# Altium PCB PCB.PcbDoc
Units mm, origin at the board's own origin, x right, y up, seen from the top; angles counter-clockwise.
Board outline 95.16 x 66.21 mm, 2 copper layers (Top Layer, Bottom Layer); 30 components, 22 nets, 105 pads, 0 vias.
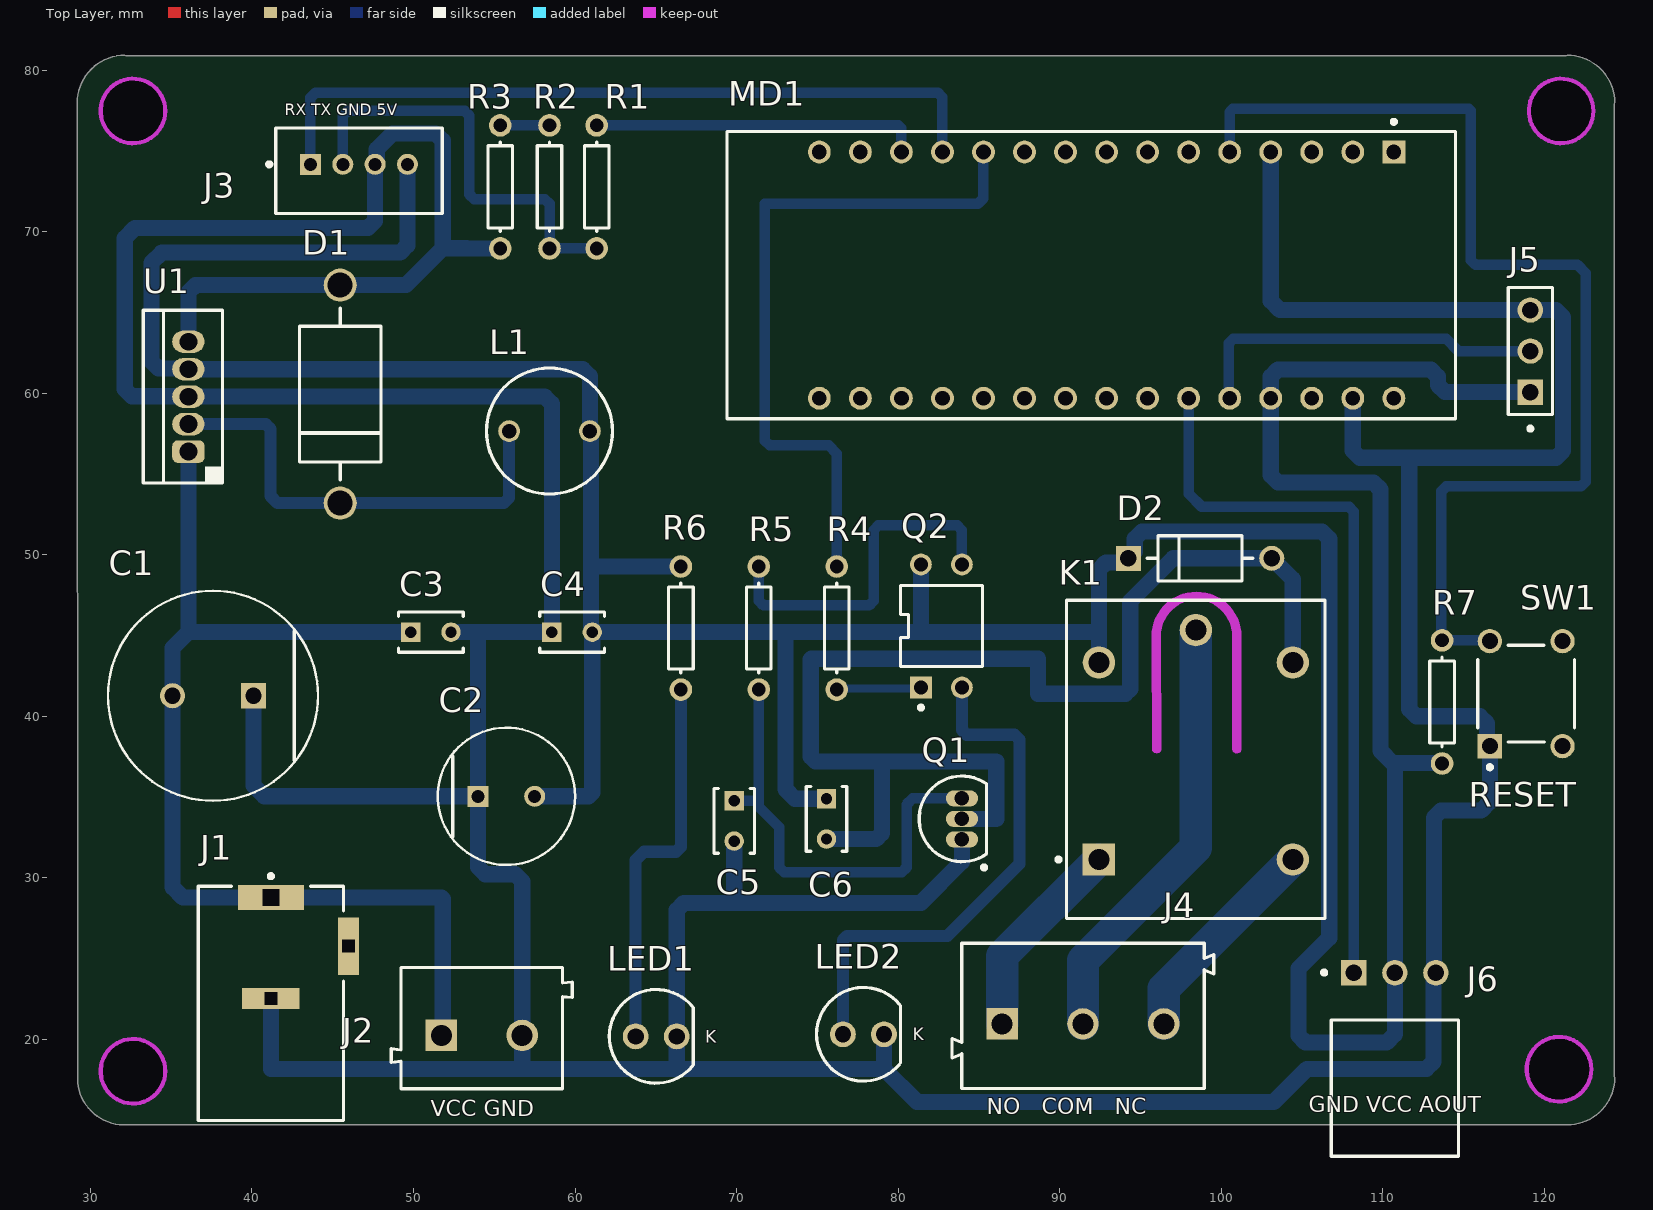
[diagram p0: Top Layer view]
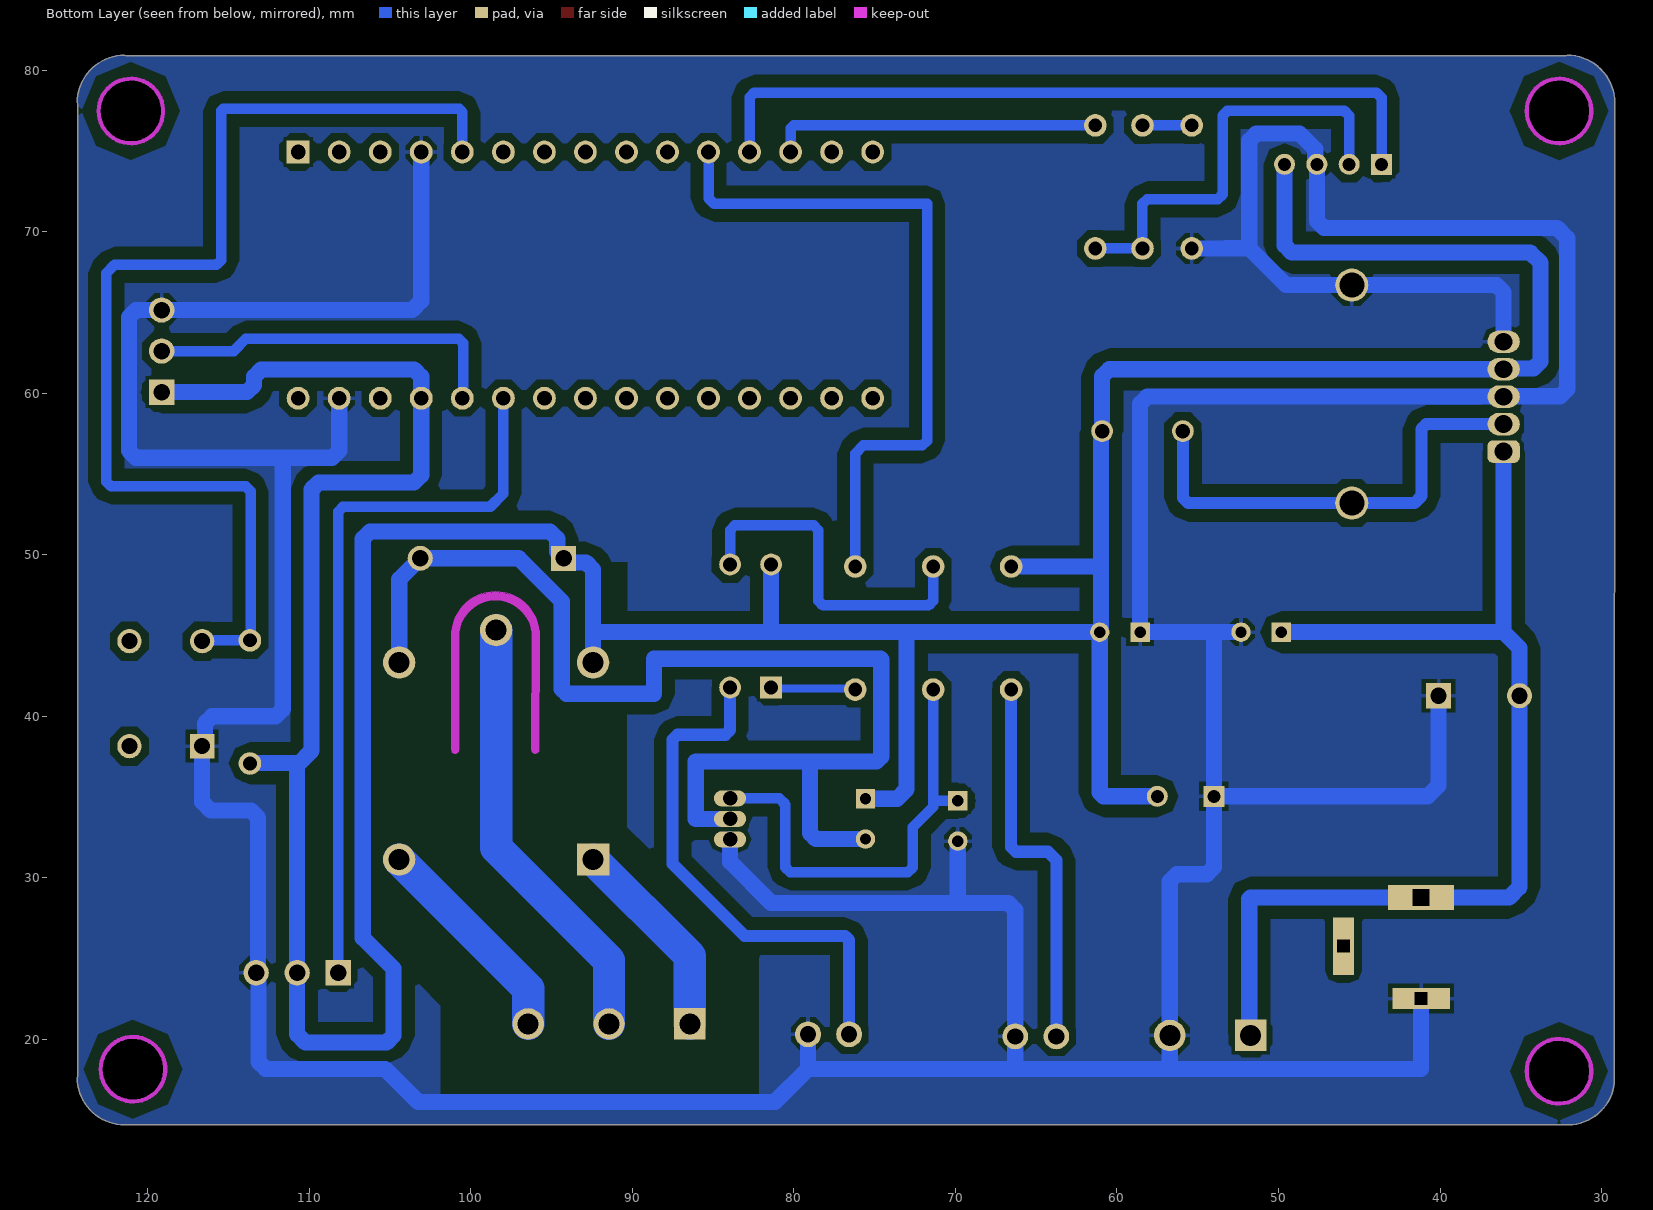
[diagram p1: Bottom Layer view, seen from below]
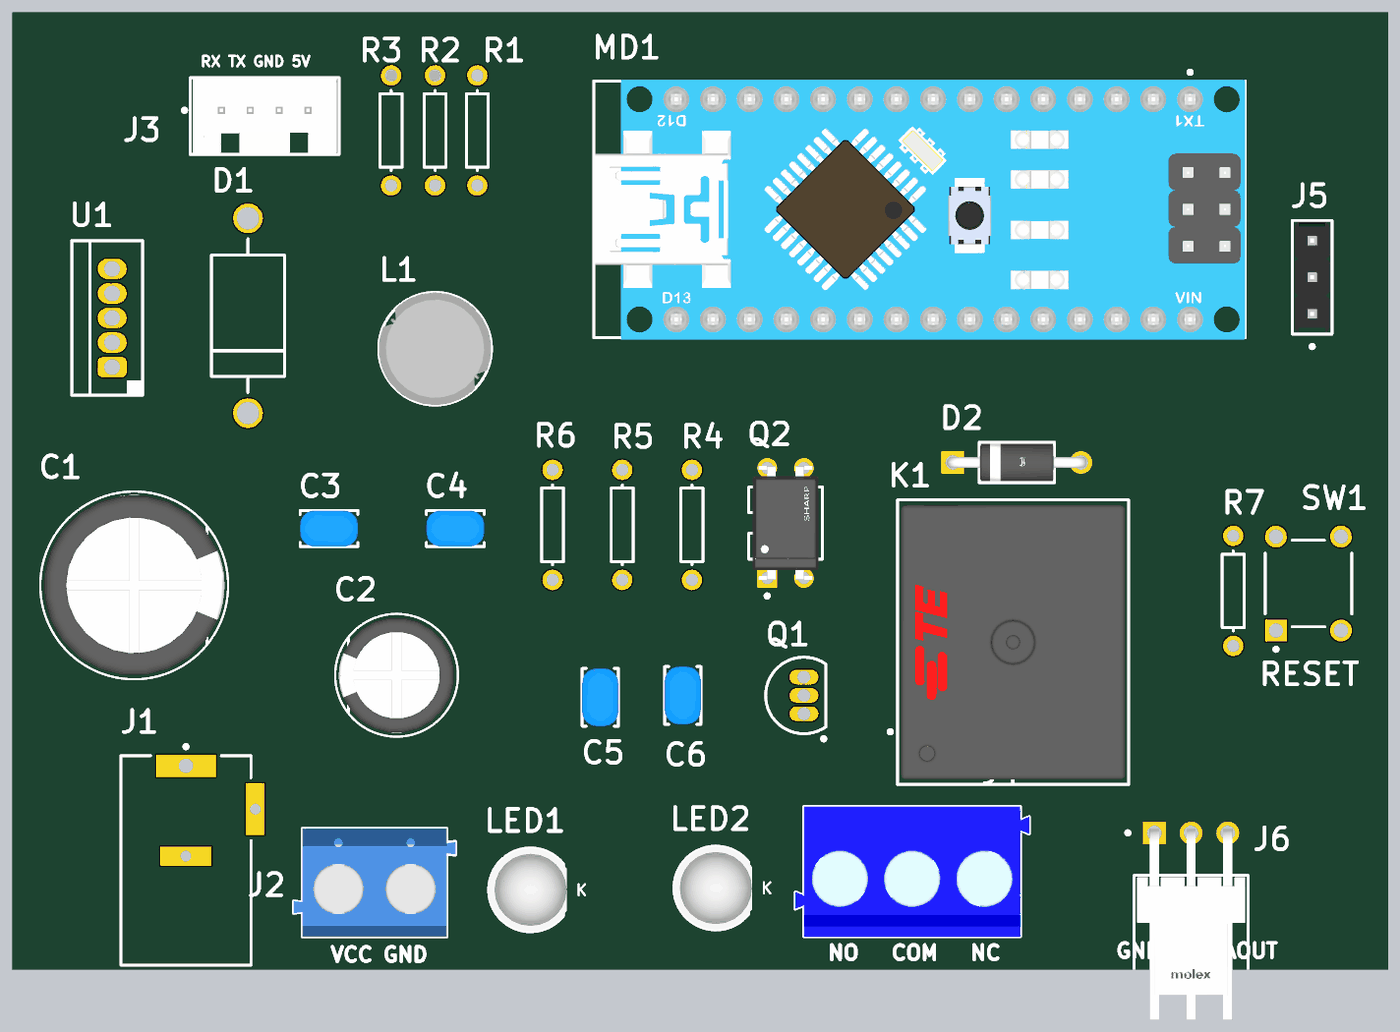
[diagram p2: 3D render of the assembled board from above, using the file's embedded part models]

## Layer stack, top to bottom
Top Solder: solder mask 0.0102, Solder Resist, Dk 3.5
Top Layer: signal copper 0.0356
Dielectric 1: dielectric 0.32, FR-4, Dk 4.8
Bottom Layer: signal copper 0.0356
Bottom Solder: solder mask 0.0102, Solder Resist, Dk 3.5

## Board outline
29.208,17.335 ccw(c32.131,17.653) 31.81,14.73 31.877,14.711 121.346,14.731 121.412,14.713 ccw(c121.412,17.653) 124.352,17.653 124.333,17.72 124.333,77.911 124.352,77.978 ccw(c121.412,77.978) 121.412,80.918 121.345,80.899 32.198,80.899 32.131,80.918 ccw(c32.131,77.978) 29.191,77.98 29.191,77.978
cut-out: 95.757,37.971 95.715,44.956 95.715,44.958 cw(c98.465,44.958) 101.215,44.958 101.215,37.973 cw(c100.965,37.973) 100.715,37.973 100.715,44.958 ccw(c98.465,44.958) 96.215,44.959 96.258,37.974 96.258,37.973 cw(c96.007,37.973)
cut-out: 118.904,18.161 ccw(c120.904,18.161) 120.904,16.161 ccw(c120.904,18.161) 122.904,18.161 ccw(c120.904,18.161) 120.904,20.161 ccw(c120.904,18.161)
cut-out: 119.031,77.47 ccw(c121.031,77.47) 121.031,75.47 ccw(c121.031,77.47) 123.031,77.47 ccw(c121.031,77.47) 121.031,79.47 ccw(c121.031,77.47)
cut-out: 32.639,75.47 cw(c32.639,77.47) 30.639,77.47 cw(c32.639,77.47) 32.639,79.47 cw(c32.639,77.47) 34.639,77.47 cw(c32.639,77.47)
cut-out: 30.639,18.034 ccw(c32.639,18.034) 32.639,16.034 ccw(c32.639,18.034) 34.639,18.034 ccw(c32.639,18.034) 32.639,20.034 ccw(c32.639,18.034)

## Design rules (kind name [scope] priority, off if disabled: settings)
Clearance [All] p1: gap=0.2 ignorepadtopadclearanceinfootprint=FALSE except(0.7: Arc-Fill Arc-Poly Arc-Region Track-Fill Track-Poly Track-Region SMDPad-Fill SMDPad-Poly SMDPad-Region Via-Fill Via-Poly Via-Region Fill-Hole Poly-Hole Region-Hole)
ComponentClearance [All] p1: gap=0.254 collisioncheckmode=3 verticalgap=0.254 showdistances=FALSE donotcheckwithout3dbody=TRUE
DiffPairsRouting [All] p1: maxlimit=1 minlimit=0.5 mostfreqgap=0.5 toplayer_minwidth=1 toplayer_maxwidth=2 toplayer_prefwidth=1 bottomlayer_minwidth=1 bottomlayer_maxwidth=2 bottomlayer_prefwidth=1 maxuncoupledlength=12.7
PolygonConnect [All] p1: connectstyle=Relief reliefconductorwidth=0.254 reliefentries=4 polygonreliefangle="90 Angle" airgapwidth=0.254
RoutingCorners [All] p1: cornerstyle=45-Degree minsetback=0.5 maxsetback=1
RoutingLayers [All] p1: top layer_v5=FALSE bottom layer_v5=TRUE
RoutingVias [All] p1: holewidth=0.711 width=1.27 viastyle="Through Hole" minholewidth=0.711 minwidth=1.27 maxholewidth=0.711 maxwidth=1.27
SolderMaskExpansion [All] p1: expansion=0.102 istentingtop=FALSE
Width other [All] p1: maxlimit=2 minlimit=0.254 preferedwidth=1 toplayer_maxwidth=0.254 toplayer_prefwidth=0.254 minimp=50.000000 maximp=50.000000 favimp=50.000000
Width gnd [InNet('GND')] p2: maxlimit=1 minlimit=1 preferedwidth=1 minimp=50.000000 maximp=50.000000 favimp=50.000000
Width 5 [InNet('+5')] p3: maxlimit=1 minlimit=1 preferedwidth=1 minimp=50.000000 maximp=50.000000 favimp=50.000000
Width 12 [InNet('+12')] p4: maxlimit=1 minlimit=1 preferedwidth=1 minimp=50.000000 maximp=50.000000 favimp=50.000000
26 further rules are at their usual default settings.

## Classes and differential pairs
component class FarmControl: C1 C2 C3 C4 C5 C6 D1 D2 J3 J4 J5 J6 K1 L1 LED1 LED2 MD1 Q1 Q2 R1 R2 R3 R4 R5 R6 R7 SW1 U1

## Components (designator, comment, footprint, x,y, rotation, side; value= is the part's Value field where it differs from the comment)
C1 "680uF" FP-RAD-TH-D_12_5_0_5-L_30-MFG 37.592,41.275 r180 top
C2 "220uF" FP-RAD-TH-D_8_0_5-L_11_5-MFG 55.753,35.052 r0 top
C3 "104" FP-RCE1A2-MFG 51.074,45.212 r0 top
C4 "104" FP-RCE1A2-MFG 59.817,45.212 r0 top
C5 "104" FP-RCE1A2-MFG 69.85,33.528 r270 top
C6 "104" FP-RCE1A2-MFG 75.565,33.655 r270 top
D1 "1N5822" ONSC-AXIAL_LEAD-2-267-05_V 45.466,59.944 r90 top
D2 "1N4007" FP-1N4007-MFG 98.684,49.784 r0 top value=15pF
J1 "POWER" SWITCH-RAPC712X-3_V 41.174,25.656 r0 top
J2 "Power" 691102710002 54.229,20.701 r0 top
J3 "ESP" FP-110990030-MFG 46.625,73.768 r0 top
J4 "relay" 691101710003 91.44,21.463 r0 top
J5 "DHT11" FP-22-28-4030-MFG 119.126,62.611 r90 top
J6 "22-05-3031" FP-22-05-3031-MFG 110.744,16.99 r0 top
K1 "Relay" FP-1-1721150-0-MFG 98.425,37.338 r90 top
L1 "33uH" WE-TI-L 58.42,57.658 r0 top
LED1 "5V_PW" "Type 5mm" 65.024,20.193 r0 top
LED2 "RL ON" "Type 5mm" 77.851,20.32 r0 top
MD1 "Arduino Nano" FP-A000005-MFG 91.948,67.31 r270 top
Q1 "C1815" TO-226-AA 83.947,33.655 r0 top
Q2 "PC817X1J000F" FP-PC817X1J000F-MFG 82.677,45.593 r90 top
R1 "Res1" AXIAL-0.3 61.341,72.771 r90 top value=1K
R2 "Res1" AXIAL-0.3 58.42,72.771 r270 top value=1K
R3 "Res1" AXIAL-0.3 55.372,72.771 r90 top value=1K
R4 "Res1" AXIAL-0.3 76.2,45.466 r90 top value=1K
R5 "Res1" AXIAL-0.3 71.374,45.466 r270 top value=1K
R6 "Res1" AXIAL-0.3 66.548,45.466 r90 top value=1K
R7 "" AXIAL-0.3 113.665,40.894 r90 top value=10K
SW1 "RESET" TECO-1825910-6_V 118.872,41.402 r90 top
U1 "LM2576HVT-5.0/NOPB" KC0005A 36.068,59.788 r180 top

## Footprints (in the part's own frame and the unit in brackets; to place one, negate y for a bottom-side part, rotate by r counter-clockwise, add the part's x,y. Pads: shape width x height; smd on the part's side, far side on the other; paste and mask are expansions set on the pad)
691101710003 [mm] "5,00mm - modular - blue - Horizontal entry with pressure clamp - 12,6mm height - 03p"
  rect 1.95x1.95 hole 1.3: 1(-5,-0.5)
  round 1.95 hole 1.3: 2(0,-0.5) 3(5,-0.5)
  silkscreen extent -8.1,-4.5 8.1,4.5, body extent -8.1,-4.5 8.1,4.5, height 12.65
691102710002 [mm] "5,00mm - modular - blue - Horizontal entry with pressure clamp - 9,9 mm height - 02p"
  rect 1.95x1.95 hole 1.3: 1(-2.5,-0.45)
  round 1.95 hole 1.3: 2(2.5,-0.45)
  silkscreen extent -5.6,-3.75 5.6,3.75, body extent -5.6,-3.75 5.6,3.75, height 9.96
AXIAL-0.3 [mm] "Axial Device, Thru-Hole; 2 Leads; 0.3 in Pin Spacing"
  round 1.4 hole 0.85: 1(-3.81,0) 2(3.81,0)
  silkscreen extent -2.77,-0.76 2.77,0.76
FP-1-1721150-0-MFG [mm]
  rect 2x2 hole 1.3 paste-1000 mask+0: 1(-6.2,6)
  round 2 hole 1.3 paste-1000 mask+0: 2(6,6) 3(8,0) 4(-6.2,-6) 5(6,-6)
  silkscreen extent -9.85,-8 9.85,8.62, body extent -9.95,-8.1 9.95,8.1, height 0.25
FP-1N4007-MFG [mm]
  rect 1.55x1.55 hole 1 paste-1000 mask+0: 1(-4.44,0)
  round 1.55 hole 1 paste-1000 mask+0: 2(4.44,0)
  silkscreen extent -3.27,-1.4 3.27,1.4, body extent -5.32,-1.5 5.32,1.5, height 0.25
FP-22-05-3031-MFG [mm]
  rect 1.57x1.57 hole 1.02 paste-1000 mask+0: 1(-2.54,7.14)
  round 1.57 hole 1.02 paste-1000 mask+0: 2(0,7.14) 3(2.54,7.14)
  silkscreen extent -4.5,-4.22 3.94,7.27, body extent -4.04,-6.02 4.04,8.03, height 0.25
FP-22-28-4030-MFG [mm]
  rect 1.57x1.57 hole 1.02 paste-1000 mask+0: 1(-2.54,0)
  round 1.57 hole 1.02 paste-1000 mask+0: 2(0,0) 3(2.54,0)
  silkscreen extent -4.92,-1.37 3.94,1.37, body extent -4.04,-1.47 4.04,1.47, height 0.25
FP-110990030-MFG [mm]
  rect 1.3x1.3 hole 0.8 paste-1000 mask+0: 1(-3,0.4)
  round 1.3 hole 0.8 paste-1000 mask+0: 2(-1,0.4) 3(1,0.4) 4(3,0.4)
  silkscreen extent -5.67,-2.65 5.15,2.65, body extent -5.25,-2.75 5.25,2.75, height 0.25
FP-A000005-MFG [mil]
  rect 55.67x55.67 hole 35.98 paste-39370.1 mask+0: 1(-300,737.5)
  round 55.67 hole 35.98 paste-39370.1 mask+0: 2(-300,637.5) 3(-300,537.5) 4(-300,437.5) 5(-300,337.5) 6(-300,237.5) 7(-300,137.5) 8(-300,37.5) 9(-300,-62.5) 10(-300,-162.5) 11(-300,-262.5) 12(-300,-362.5) 13(-300,-462.5) 14(-300,-562.5) 15(-300,-662.5) 16(300,-662.5) 17(300,-562.5) 18(300,-462.5) 19(300,-362.5) 20(300,-262.5) 21(300,-162.5) 22(300,-62.5) 23(300,37.5) 24(300,137.5) 25(300,237.5) 26(300,337.5) 27(300,437.5) 28(300,537.5) 29(300,637.5) 30(300,737.5)
  silkscreen extent -379,-888 350,888, body extent -354,-891 354,891, height 10
FP-PC817X1J000F-MFG [mm]
  rect 1.35x1.35 hole 0.85 paste-1000 mask+0: 1(-3.81,1.27)
  round 1.35 hole 0.85 paste-1000 mask+0: 2(-3.81,-1.27) 3(3.81,-1.27) 4(3.81,1.27)
  silkscreen extent -5.17,-2.54 2.5,2.54, body extent -4.58,-2.64 4.58,2.64, height 0.25
FP-RAD-TH-D_8_0_5-L_11_5-MFG [mm]
  rect 1.3x1.3 hole 0.8 paste-1000 mask+0: 1(-1.75,0)
  round 1.3 hole 0.8 paste-1000 mask+0: 2(1.75,0)
  silkscreen extent -4.25,-4.25 4.25,4.25, body extent -4.35,-4.35 4.35,4.35, height 0.25
FP-RAD-TH-D_12_5_0_5-L_30-MFG [mm]
  rect 1.55x1.55 hole 1 paste-1000 mask+0: 1(-2.5,0)
  round 1.55 hole 1 paste-1000 mask+0: 2(2.5,0)
  silkscreen extent -6.5,-6.5 6.5,6.5, body extent -6.6,-6.6 6.6,6.6, height 0.25
FP-RCE1A2-MFG [mm]
  rect 1.2x1.2 hole 0.7 paste-1000 mask+0: 1(-1.25,0)
  round 1.2 hole 0.7 paste-1000 mask+0: 2(1.25,0)
  silkscreen extent -2,-1.25 2,1.25, body extent -2.1,-1.35 2.1,1.35, height 0.25
KC0005A [mm] "FM, 5-Leads, Body 10.16x8.46mm, Pitch 1.7mm"
  rrect50% 2x1.4 hole 1.1: 1(0,3.4)
  oval 2x1.4 hole 1.1: 2(0,1.7) 3(0,0) 4(0,-1.7) 5(0,-3.4)
  silkscreen extent -2.13,-5.36 2.8,5.34, body extent -2.08,-5.35 2.77,5.35, height 16.51
ONSC-AXIAL_LEAD-2-267-05_V [mm] "AXIAL, 2-Leads, Diameter 5.05mm"
  round 2.05 hole 1.55: 1(-6.745,0) 2(6.745,0)
  silkscreen extent -5.32,-2.53 5.32,2.53
SWITCH-RAPC712X-3_V [mm] "CONN, 3-Leads, Body 14.5x9mm"
  rect 4.1x1.55 hole 1.01 square: 1(0,3.125)
  rect 3.55x1.3 hole 0.76 square: 2(0,-3.125)
  rect 1.3x3.55 hole 0.76 square: 3(4.8,0.125)
  silkscreen extent -4.5,-10.67 4.5,4.57, body extent -4.5,-10.68 4.5,3.83, height 11
TECO-1825910-6_V [mm] "Switch, 4-Leads, Body 5.99x5.99mm"
  rect 1.5x1.5 hole 0.99: 1(-3.25,2.25)
  round 1.5 hole 0.99: 2(3.25,2.25) 3(-3.25,-2.25) 4(3.25,-2.25)
  silkscreen extent -4.67,-2.99 2.99,3, body extent -3,-2.99 2.99,3, height 5
TO-226-AA [mm] "TO, Flat Index; 3 In-Line, Axial Leads; Body Dia. 4.8mm; Leads 0.55 x 0.51 mm (max)"
  oval 2x1 hole 0.9: 1(0,-1.27) 2(0,0) 3(0,1.27)
  silkscreen extent -2.65,-3.13 1.52,2.65, body extent -2.65,-2.66 1.52,2.66, height 5.33
"Type 5mm" [mm] "THT, LED-5mm, 2pin- Body 5.8mm"
  round 1.6 hole 1: 1(1.27,0) 2(-1.27,0)
  silkscreen extent -2.9,-2.9 2.29,2.9, body extent -2.9,-2.9 2.5,2.9, height 11.7
WE-TI-L [mm] "THT Inductor, 2-Leads, Body 8,0  mm"
  round 1.35 hole 0.9: 1(-2.5,0) 2(2.5,0)
  silkscreen extent -3.9,-3.9 3.9,3.9, body extent -3.9,-3.9 3.89,3.9, height 9.5

## Part data
C1: library part CMP-05427-002075-1, "Aluminum Electrolytic Capacitors (Radial Lead Type) AEC-Q200 Qualified 680uF ±20% 50V", Case/Package=Radial, ESR (Equivalent Series Resistance)=40mR, Leakage Current=3uA, Max Operating Temperature=105°C, Min Operating Temperature=-55°C, Package Quantity=100, Ratings=AEC-Q200, Ripple Current=2.215A, Tolerance=20%, Voltage=50V, Capacitance=680uF, Construction=RADIAL, Diameter=12.5mm, Height=30mm, Height - Seated (Max)=1.181inch, Impedance=40mR, Lead Diameter=0.8mm, Lead Free="Lead Free", Lead Pitch=5mm, Length=30mm, Life (Hours)=5000Hour, Material=Aluminium, Mount="Through Hole", Number of Pins=2, Packaging=Bulk, Radiation Hardening=No, REACH SVHC="No SVHC", Ripple Current (AC)=2.215A, RoHS Compliant=Yes, Series=FC, Termination=Radial, Voltage Rating=50V, Voltage Rating (DC)=50V, Width=12.5mm
C2: library part CMP-05427-000847-1, "Aluminum Electrolytic Capacitors (Radial Lead Type) 220uF ±20% 25V", Case/Package=Radial, Max Operating Temperature=105°C, Min Operating Temperature=-40°C, Ripple Current=950mA, Tolerance=20%, Voltage=25V, Capacitance=220uF, Construction=RADIAL, Contact Plating=Tin, Diameter=8mm, Height=11.5mm, Impedance=56mR, Lead Diameter=0.6mm, Lead Pitch=3.5mm, Life (Hours)=6000Hour, Mount="Through Hole", REACH SVHC=Yes, Ripple Current (AC)=950mA, RoHS Compliant=Yes, Series="FR Radial", Termination=Radial, Voltage Rating=25V, Voltage Rating (DC)=25V
C3 C4 C5 C6: library part CMP-06035-052488-1, "Cap Ceramic 100nF 100V X7R ±10% Radial 2.5mm +125°C Automotive Ammo Pack", Capacitance=100nF, Case/Package=Radial, Dielectric=X7R, Max Operating Temperature=125°C, Min Operating Temperature=-55°C, Package Quantity=2000, Ratings=AEC-Q200, Resistor Type=Ceramic, Tolerance=10%, Voltage Rating=100V, Height=3.5mm, Height - Seated (Max)=0.138inch, Lead Diameter=0.5mm, Lead Free="Lead Free", Lead Pitch=0.098inch, Lead/Base Style=Straight, Length=0.157inch, Mount="Through Hole", Packaging="Tape and Reel", Termination=Radial, Voltage Rating (DC)=100V, Width=0.098inch
D1: library part CMP-1055-00007-1, "Rectifier, 2-Pin Axial_Lead, Bulk Bag", Manufacturer="On Semiconductor", ComponentLink1Description="Manufacturer URL", ComponentLink1URL=http://www.onsemi.com/, ComponentLink2Description=Datasheet, ComponentLink2URL=http://www.onsemi.cn/pub_link/Collateral/1N5820-D.PDF, ComponentLink3Description="Package Specification", ComponentLink3URL=http://www.onsemi.com/pub_link/Collateral/267-05.PDF, Configuration=Single, DatasheetVersion="Rev. 10", IFSM Max (A)=80, Mounting Technology="Through Hole", Note1=0, PackageDescription="2-Pin, Axial Lead, Diameter 5.05 mm", PackageReference=AXIAL_LEAD-2-267-05, PackageVersion="Rev. G, 06/2000", Packing="Bulk Bag", PartNumber=1N5822, RoHS=FALSE
D2: library part CMP-123542-000001-1, "Rectifier diode 1000 V 1 A DO-41, ,", Capacitance=15pF, Forward Current=1A, Manufacturer=Diotec, Max Junction Temp=+175°C, Max Repetitive Reverse Voltage=1000V, Max Surge Forward Current=27A, Peak Reverse Current=5uA, Temperature="-50°C to +175°C", Temperature Range Low=-50°C, Automotive=No, Category=Diode, ComponentLink2Description=Datasheet, ComponentLink2URL=https://datasheet.octopart.com/1N4007-Diotec-datasheet-62346875.pdf, Device Class L1="Discrete Semiconductors", Device Class L2=Diodes, Device Class L3="Rectifier Diodes", Height=2.8mm, Ipc Land Pattern Name=DIOAD888W100L520D280, Lead Free=Yes, Manufacturer Part Number=1N4007, Octopart=https://octopart.com/1n4007-diotec-4040411, Package=1N4007, Reverse Voltage=1000V, RoHS=TRUE, Temperature Range High=+175°C
J1: library part CMP-2000-05383-1, "Conn Powerjack Mini R/A PCMT, 5 A, 3-Pin THD, RoHS", Color=Black, Current Rating=5A, Manufacturer=Switchcraft, Standard Package=2,500, Catalog Drawings="RAPC7(1,2)2XSide /  / RAPC7(1,2)2XTop", Category=Connectors,Interconnects, Connector Type=Jack, Contact Material=Brass, Contact Material - Plating=Nickel, Datasheet URL=https://datasheet.ciiva.com/391/rapc712x-cd-391666.pdf, Datasheet Version="Rev. A, 08/2005", Dynamic Catalog=SwitchcraftInc, Family=Barrel-PowerConnectors, Gender=Male, Housing Color=Black, Housing Material=Thermoplastic, Internal Switch(s)=SingleSwitch,NormallyClosed, Manufacturer URL=http://www.switchcraft.com/, Mating Products="SC1539-ND / -CONNPLUGMINIPWR2CONDBLK/RED / SC1051-ND / -CONNPLUGMINIPOWER2CONDBLACK", Mounting Type=ThroughHole,RightAngle, Number of Positions/Contacts=2Conductors,2Contacts, Other Names="Q2387461 / Q2526383 / RAPC712X-ND / SC237", Plug/Mating Plug Diameter=2.5mmID,5.5mmOD, RoHS Information=SwitchcraftRoHSInfo, Shielding=Unshielded, Termination=SolderEyelet(s)
J2: library part CMP-1502-03258-1, "Series 102 - 5.00 mm Horizontal Entry Modular with Pressure Clamp WR-TBL, 2 pin", Manufacturer="Wurth Elektronik", Operating Temperature=-40to105degC, Package Reference=691102710002, Datasheet URL=http://katalog.we-online.de/em/datasheet/6911027100xx.pdf, Manufacturer URL=http://www.we-online.de, Mounting Technology=THT, Packaging=Box, Part Number=691102710002, Pin Number=2, Pitch=5.00mm, Publisher=WurthElektronik
J3: library part CMP-139044-000001-1, "GROVE 2MM 4PIN VERT CONN 10PCS", Series=-
J4: library part CMP-1502-03257-1, "Series 101 - 5.00 mm Horizontal Entry Modular with Pressure Clamp WR-TBL, 3 pin", Manufacturer="Wurth Elektronik", Operating Temperature=-40to105degC, Package Reference=691101710003, Datasheet URL=http://katalog.we-online.de/em/datasheet/6911017100xx.pdf, Manufacturer URL=http://www.we-online.de, Mounting Technology=THT, Packaging=Box, Part Number=691101710003, Pin Number=3, Pitch=5.00mm, Publisher=WurthElektronik
J5: library part CMP-04776-000098-1, "CONN HEADER VERT 3POS 2.54MM", Current Rating=4A, Manufacturer=Molex, Manufacturer Part Number=22-28-4030, Temperature="-40°C to +80°C", Temperature Range High=+80°C, Temperature Range Low=-40°C, Voltage Rating=500V, Automotive=No, Category=Conn, ComponentLink2Description=Datasheet, ComponentLink2URL=https://www.molex.com/webdocs/datasheets/pdf/en-us/0022284030_PCB_HEADERS.pdf, Conn Gender=Male, Conn Orientation=Vertical, Contact Material=Gold,Nickel, Device Class L1=Connectors, Device Class L2="Headers and Wire Housings", Device Class L3=unset, Digikey Description="CONN HEADER VERT 3POS 2.54MM", Footprint Url=https://www.molex.com/pdm_docs/sd/022284030_sd.pdf, Height=8.88mm, Lead Free=Yes, Mouser Description="Headers & Wire Housings 3P VERT HEADER Sn", Number Of Contacts=3, Number Of Rows=1, Octopart=https://octopart.com/0022284030-molex-10476094, Package=22-28-4030, Pitch=2.54mm, RoHS=TRUE
J6: library part CMP-04776-000253-1, "CONN HEADER R/A 3POS 2.54MM", Color=White, Contact Resistance=10mR, Current Rating=4A, Flammability Rating="UL94 V-0", Insulation Resistance=50GR, Max Operating Temperature=75°C, Min Operating Temperature=0°C, Package Quantity=2000, Voltage Rating=250V, Approvals=UL, Contact Material=Brass, Contact Mating Length=0.264inch, Contact Plating=Tin, Contact Type="Male Pin", Depth=12.83mm, Fastening Type=Friction, Gender=Male, Glow Wire Compliant=Non-compliant, Halogen Free="Low Halogen", Height=6.35mm, Housing Color=White, Housing Material=Nylon, Lead Free="Lead Free", Lead Pitch=2.54mm, Length=7.62mm, Max Current Rating=4A, Mount="Through Hole", Number of Circuits=3, Number Of Contacts=3, Number of Positions=3, Number Of Rows=1, Orientation="Right Angle", Packaging=Bulk, Pitch=2.54mm, Radiation Hardening=No, RoHS Compliant=Yes, Series=7478, Termination=Solder, Voltage Rating (DC)=250V
K1: library part CMP-03395-000112-1, "RELAY GEN PURPOSE SPDT 10A 5V", Ambient Temperature Range High=+70°C, Ambient Temperature Range Low=-30°C, Coil Power=360mW, Coil Resistance=70Ω, Coil Voltage=5V, Current Rating=10A, Manufacturer=TE, Manufacturer Part Number=1-1721150-0, Automotive=No, Category=Relay, Coil Type=Non-Latching, ComponentLink2Description=Datasheet, ComponentLink2URL=https://www.te.com/usa-en/product-1-1721150-0.html?te_bu=Cor&te_type=other&te_campaign=oct_glo_cor-oct-global-oth-prtnr-fy19-oct-octo-buy-bom_sma-298_2&elqCampaignId=35216, Device Class L1=Electromechanical, Device Class L2=Relays, Device Class L3="Power Relays", Digikey Description="RELAY GEN PURPOSE SPDT 10A 5V", Height=16.3mm, Lead Free=Yes, Number Of Contacts=1, Octopart=https://octopart.com/1-1721150-0-te+connectivity-41294869, Package=1-1721150-0, RoHS=TRUE, Standoff Height=0.2mm, Switching Current=10A, Throw Configuration=SPDT
L1: library part CMP-1405-00029-1, "Radial Leaded Wire Wound Inductor WE-TI, L=330 µH", Inductance="330 ÂµH", Manufacturer="Wuerth Elektronik", PartNumber=744772331, ComponentLink1Description="Manufacturer URL", ComponentLink1URL=http://www.we-online.com, ComponentLink2Description=Datasheet, ComponentLink2URL=http://www.we-online.de/katalog/media/pdf/744772331.pdf, PackageDescription="THT Inductor, 2-Leads, Body 7.8 x 7.8 mm", PackageReference=WE-TI-L
LED1 LED2: library part CMP-1488-00009-1, "THT LED round mono-color color lens, WL-TMRW, Blue", Emitting color=Blue, Manufacturer="Wuerth Elektronik", PartNumber=151051BS04000, ComponentLink1Description="Manufacturer URL", ComponentLink1URL=http://www.we-online.com, ComponentLink2Description=Datasheet, ComponentLink2URL=http://katalog.we-online.de/pbs/datasheet/7448042001.pdfhttp://katalog.we-online.de/pbs/datasheet/7448042001.pdfhttp://katalog.we-online.de/pbs/datasheet/7448042001.pdfhttp://katalog.we-online.de/pbs/datasheet/151051BS04000.pdf, PackageReference="Type 5mm"
MD1: library part CMP-189986-000002-1, "ARDUINO NANO ATMEGA328 EVAL BRD", Operating Supply Voltage=12V, Package Quantity=50, Core Architecture=AVR, Data Bus Width=8b, Evaluation Kit=Yes, Height=0.25inch, Interface=I2C, Length=7inch, Number of Bits=8, Packaging=Bulk, REACH SVHC="No SVHC", Series="AVR® ATmega", Weight=0.358383oz, Width=5inch
Q1: library part NPN, "NPN Bipolar Transistor", Code_JEDEC=TO-226-AA, LatestRevisionDate=17-Jul-2002, LatestRevisionNote="Re-released for DXP Platform.", PackageDescription="TO, Flat Index; 3 In-Line, Axial Leads; Body Dia. 4.8mm; Leads 0.55 x 0.51 mm (max)", PackageReference=TO-226-AA, Published=8-Jun-2000, Publisher="Altium Limited"
Q2: library part CMP-65434-000003-1, "OPTOISOLATOR 5KV TRANS 4DIP", Case/Package=DIP, Collector Emitter Breakdown Voltage=80V, Collector Emitter Saturation Voltage=200mV, Current Transfer Ratio=600%, Forward Current=50mA, Forward Voltage=1.4V, Input Current=20mA, Isolation Voltage=5kV, Max Operating Temperature=100°C, Max Power Dissipation=200mW, Min Operating Temperature=-30°C, Package Quantity=2000, Reverse Breakdown Voltage=6V, Collector Emitter Voltage (VCEO)=80V, Fall Time=18000ns, Max Collector Current=50mA, Max Input Current=50mA, Mount="Through Hole", Number of Channels=1, Number of Elements=1, Number of Pins=4, Output Current per Channel=50mA, Output Voltage=80V, Packaging=Sleeve, Power Dissipation=200mW, Radiation Hardening=No, Rise Time=18000ns
R1 R2 R3 R4 R5 R6: "Resistor", LatestRevisionDate=17-Jul-2002, LatestRevisionNote="Re-released for DXP Platform.", PackageDescription="Axial Device, Thru-Hole; 2 Leads; 0.3 in Pin Spacing", PackageReference=AXIAL-0.3, Published=8-Jun-2000, Publisher="Altium Limited"
R7: library part Res1, "Resistor", LatestRevisionDate=17-Jul-2002, LatestRevisionNote="Re-released for DXP Platform.", PackageDescription="Axial Device, Thru-Hole; 2 Leads; 0.3 in Pin Spacing", PackageReference=AXIAL-0.3, Published=8-Jun-2000, Publisher="Altium Limited"
SW1: library part CMP-1684-00021-1, "Tact Switch, SPST-NO, 0.05 A, -35 to 85 degC, 4-Pin THD, RoHS, Bulk", Actuator Color=Black, Contact Rating @ Voltage=0.05A@24VDC, Dielectric Strength=500VAC, Manufacturer="TE Connectivity", Maximum AC Voltage Rating=N/A, Maximum Contact Resistance=100mOhm, Maximum DC Voltage Rating=24V, Minimum Insulation Resistance=100MOhm, Operating Temperature=-35to85C, Package Description="4-Pin Through Hole Device, Body 5.99 x 5.99 mm, Pitch 6.5 mm", Package Reference=THD, Part No=1825910-6, Actuator Length=1.4mm, Actuator Material=PolybutyleneTerephthalate, Actuator Style=RoundButton, Base Material=N/A, Body Orientation=Straight, Bushing Type=Unthreaded, Contact Material=CopperAlloy, Contact Plating=Silver, Datasheet URL=http://www.te.com/commerce/DocumentDelivery/DDEController?Action=showdoc&DocId=Customer+Drawing%7F1825910%7FC9%7Fpdf%7FEnglish%7FENG_CD_1825910_C9.pdf%7F1825910-6, Datasheet Version="Rev. C9", Dimension=5.99x5mm, Electrical Life=100000Cycles, Family=1825910, Function=MomentaryContact, Housing Material=N/A, Illumination=N/R, Manufacturer URL=http://www.te.com, Mechanical Life=100000Cycles, Mounting=ThroughHole, Packaging=N/A, Pole Throw Configuration=SPST, Product Weight=N/A, RoHS=Yes, Seal Description=N/A, Seal Location=N/A, Switch Configuration=OFF(ON), Terminal Type=PCPins, Thread Size=N/R
U1: library part CMP-0069-01992-3, "SIMPLE SWITCHER® 3A Step-Down Voltage Regulator, 5-pin TO-220, Pb-Free", Manufacturer="Texas Instruments", PackageTopMarking="NSUZXYTTE#*LM2576HVT*-5.0 P+", PowerWise=N, Code_JEDEC=TO-220-AB, ComponentLink1Description="Datasheet URL", ComponentLink1URL=http://www.ti.com/general/docs/lit/getliterature.tsp?genericPartNumber=LM2576HV&fileType=pdf, CompType=Switcher, PackageDescription="TO-220, Molded, 5 Lead, Straight", PackageReference=KC0005A, PinCount=5, RoHS=Y

## Nets (pads, with @x,y where several pads share a name; then routed paths per layer and width w, separated by ;. In a path a pad name is that pad's centre, name@x,y a point inside that pad or via, vN(x,y) a via of type N, cw(c..) or ccw(c..) an arc to the next point about the centre after c; other vN are vias at no path point)
5V: 
+5: C2.2 C4.2 C6.1 D2.1 J3.4 J5.1 J6.2 K1.2 L1.2 MD1.27 Q2.4 R6.2 R7.1 U1.4 | length 265.1
  Bottom Layer w1: J3.4 49.625,69.146 49.186,68.707 34.417,68.707 33.782,68.072 33.782,61.97 34.221,61.53 36.026,61.53 U1.4 60.481,61.488 60.92,61.049 L1.2 60.994,57.585 60.994,49.149 ; C2.2 60.833,35.052 61.067,35.286 C4.2 ; R6.2 61.121,49.276 60.994,49.149 ; C6.1 73.611,34.905 73.025,35.491 73.025,45.212 ; Q2.4 81.407,45.212 ; K1.2 92.425,45.212 ; R7.1@113.665,37.105 110.617,37.105 ; J5.1 113.85,60.071 113.411,60.51 113.411,61.029 112.972,61.468 103.5,61.468 103.06,61.029 MD1.27 103.06,54.922 103.5,54.483 109.416,54.483 109.855,54.044 109.855,37.867 110.617,37.105 ; 60.994,49.149 60.994,45.285 C4.2 ; C4.2 73.025,45.212 ; 73.025,45.212 81.407,45.212 ; 81.407,45.212 92.425,45.212 ; 92.425,45.212 92.425,49.083 92.864,49.523 93.983,49.523 D2.1 94.644,50.184 94.644,50.996 95.083,51.435 106.241,51.435 106.68,50.996 106.68,26.289 104.775,24.384 104.775,20.251 105.214,19.812 110.236,19.812 110.744,20.32 J6.2 110.744,36.978 110.617,37.105
+12: C1.2 C3.1 J1.1 J2.1 U1.1 | length 66.6
  Bottom Layer w1: U1.1 36.068,45.212 ; C3.1 36.068,45.212 ; J2.1 51.816,20.338 51.816,28.702 51.737,28.781 35.735,28.781 35.092,29.424 C1.2 35.092,44.236 36.068,45.212
COM: J4.2 K1.3 | length 27.3
  Bottom Layer w2: J4.2 91.44,24.892 98.425,31.877 K1.3
D5: MD1.11 R4.2 | length 43
  Bottom Layer w0.65: R4.2@76.2,49.279 76.2,56.261 75.692,56.769 72.048,56.769 71.755,57.062 71.755,71.733 84.941,71.733 85.281,72.072 MD1.11
DHT: J5.2 MD1.26 | length 22.5
  Bottom Layer w0.65: MD1.26 100.457,59.753 100.457,63.08 100.75,63.373 113.919,63.373 114.681,62.611 J5.2
GND: C1.1 C2.1 C3.2 C4.1 C5.2 D1.2 J1.2 J2.2 J3.3 J5.3 J6.3 LED1.1 LED2.1 MD1.4 MD1.29 Q1.1 R3.1 SW1.1 U1.3 U1.5 | length 372.5
  Bottom Layer w1: U1.3 58.128,59.788 58.567,59.349 C4.1 53.975,45.212 ; U1.3@36.068,59.817 32.57,59.817 32.131,60.256 32.131,69.596 32.766,70.231 47.186,70.231 47.625,70.67 J3.3 47.73,74.273 47.73,75.104 48.699,76.073 51.377,76.073 51.816,75.634 51.816,68.977 ; U1.5@36.068,63.104 U1.5 36.068,66.25 36.507,66.689 D1.2 49.528,66.689 51.816,68.977 ; C1.1 40.092,35.727 40.767,35.052 C2.1 ; J1.2 41.174,18.183 56.729,18.183 ; C3.2 53.975,45.212 ; R3.1 53.294,68.961 53.278,68.977 51.816,68.977 ; C5.2 69.85,28.448 ; LED2.1 79.121,18.415 79.121,18.183 ; Q1.1 83.947,30.988 81.407,28.448 69.85,28.448 ; MD1.4 103.06,65.717 103.627,65.151 J5.3 119.131,65.146 120.719,65.146 121.158,64.707 121.158,56.446 120.719,56.007 111.633,56.007 ; MD1.29 108.14,56.446 108.58,56.007 111.633,56.007 ; 53.975,45.212 54.003,45.184 C2.1 ; C2.1 54.003,30.665 54.442,30.226 56.29,30.226 56.729,29.787 J2.2 56.729,18.183 ; 56.729,18.183 66.294,18.183 ; 66.294,18.183 79.121,18.183 ; 66.294,18.183 LED1.1 66.294,28.009 66.733,28.448 69.85,28.448 ; 79.121,18.183 81.175,16.129 103.251,16.129 105.305,18.183 112.696,18.183 113.135,18.622 113.135,23.981 J6.3 113.157,24.257 113.157,33.724 113.596,34.163 116.078,34.163 116.622,34.707 SW1.1 116.445,38.329 116.445,39.566 116.005,40.005 112.072,40.005 111.633,40.444 111.633,56.007
NC: J4.3 K1.4 | length 13.5
  Bottom Layer w2: J4.3 96.44,23.153 K1.4
NetC5_1: C5.1 Q1.3 R5.2 | length 28.7
  Bottom Layer w0.65: C5.1 71.374,34.778 ; R5.2 71.374,34.778 ; Q1.3 80.899,34.925 80.518,34.544 80.518,30.646 80.225,30.353 72.937,30.353 72.644,30.646 72.644,33.147 71.374,34.417 71.374,34.778
NetC6_2: C6.2 D2.2 K1.5 Q1.2 | length 75.8
  Bottom Layer w1: C6.2 78.633,32.405 78.994,32.766 78.994,36.957 78.74,37.211 ; Q1.2 86.067,33.655 86.067,37.211 78.74,37.211 ; K1.5 104.425,48.483 D2.2 97.028,49.784 94.361,47.117 94.361,41.695 94.068,41.402 88.646,41.402 88.646,43.561 74.627,43.561 74.588,43.522 74.588,37.504 74.881,37.211 78.74,37.211
NetD1_1: D1.1 L1.1 U1.2 | length 28.6
  Bottom Layer w0.75: U1.2 40.855,58.088 41.148,57.795 41.148,53.633 41.582,53.199 D1.1 55.587,53.199 55.92,53.532 L1.1
NetJ3_2: J3.2 R1.1 R2.2 | length 26.8
  Bottom Layer w0.65: J3.2 45.625,77.177 45.918,77.47 53.174,77.47 53.467,77.177 53.467,72.302 53.76,72.009 58.127,72.009 58.42,71.716 R2.2 R1.1
NetLED1_2: LED1.2 R6.1 | length 23.8
  Bottom Layer w0.75: LED1.2 63.754,31.115 64.262,31.623 66.255,31.623 66.548,31.916 R6.1@66.548,41.674
NetLED2_2: LED2.2 Q2.2 | length 32.8
  Bottom Layer w0.75: LED2.2 76.581,26.162 76.835,26.416 83.058,26.416 87.503,30.861 87.503,38.569 87.21,38.862 84.24,38.862 83.947,39.155 Q2.2
NetQ2_1: Q2.1 R4.1 | length 5.3
  Bottom Layer w0.5: R4.1 76.263,41.719 81.343,41.719 Q2.1
NetQ2_3: Q2.3 R5.1 | length 21.7
  Bottom Layer w0.65: R5.1 71.374,47.156 71.667,46.863 78.193,46.863 78.486,47.156 78.486,51.523 78.779,51.816 83.654,51.816 83.947,51.523 Q2.3
NetR2_1: R2.1 R3.2 | length 3
  Bottom Layer w0.65: R3.2 R2.1
NO: J4.1 K1.1 | length 12.7
  Bottom Layer w2: J4.1 86.44,25.153 K1.1
RS: MD1.5 R7.2 SW1.2 | length 68.5
  Bottom Layer w0.65: MD1.5 100.52,77.406 100.711,77.597 115.316,77.597 115.443,77.47 115.443,68.238 115.736,67.945 122.047,67.945 122.555,67.437 122.555,54.522 122.262,54.229 113.921,54.229 113.628,53.936 113.628,44.741 R7.2 116.57,44.704 SW1.2
RX: J3.1 MD1.12 | length 46.9
  Bottom Layer w0.65: J3.1 43.625,78.296 43.942,78.613 82.448,78.613 82.74,78.32 MD1.12
SOIL: J6.1 MD1.25 | length 45.1
  Bottom Layer w0.65: MD1.25 97.98,53.785 98.806,52.959 107.911,52.959 108.204,52.666 J6.1
TX: MD1.13 R1.2 | length 20.4
  Bottom Layer w0.65: R1.2 80.01,76.581 80.2,76.391 MD1.13
pads on no net: J1.3 MD1.1 MD1.2 MD1.3 MD1.6 MD1.7 MD1.8 MD1.9 MD1.10 MD1.14 MD1.15 MD1.16 MD1.17 MD1.18 MD1.19 MD1.20 MD1.21 MD1.22 MD1.23 MD1.24 MD1.28 MD1.30 SW1.3 SW1.4

## Polygon pours and split planes (outlines as drawn)
GND on Bottom Layer "GND_L02_P001" (solid, pour order 1): 29.191,17.399 29.191,17.655 29.191,77.978 29.191,77.981 cw(c32.131,77.978) 32.131,80.918 32.198,80.899 121.345,80.899 121.412,80.918 cw(c121.412,77.978) 124.352,77.978 124.333,77.911 124.333,17.72 124.352,17.653 cw(c121.412,17.653) 121.412,14.713 121.345,14.731 31.877,14.711 31.81,14.73 cw(c32.131,17.653)

## Keep-outs
Keep-Out Layer:
  circle w0.254: c32.639,18.034 r2
  circle w0.254: c32.639,77.47 r2
  circle w0.254: c120.904,18.161 r2
  circle w0.254: c121.031,77.47 r2
  pour cut-out: 30.639,18.034 ccw(c32.639,18.034) 32.639,16.034 ccw(c32.639,18.034) 34.639,18.034 ccw(c32.639,18.034) 32.639,20.034 ccw(c32.639,18.034)
  lines w0.5: 96.007,37.973 95.965,44.958 cw(c98.465,44.958) 100.965,44.958 ; 100.965,37.973 100.965,44.918

## Other copper
Bottom Layer:
  pour cut-out: 82.169,16.637 82.169,25.019 90.297,33.147 90.297,49.53 106.172,49.53 106.172,26.416 101.854,22.098 101.854,16.637

## Silkscreen, mask and mechanical layers (free items; w line width, h text height)
Top Overlay:
  lines w0.254: 43.053,57.531 47.879,57.531
  text "RX TX GND 5V" at 42.037,77.216 h0.7
  text "RESET" at 115.316,34.417 h1.52
  text "GND VCC AOUT" at 105.41,15.502 h1
  text "NO   COM   NC" at 85.471,15.367 h1
  text "VCC GND" at 51.054,15.24 h1
Mechanical 1:
  lines w0.254: 29.318,17.399 29.318,77.978 cw(c32.131,77.978) 32.131,80.791 ; 29.318,17.653 ccw(c32.131,17.653) 32.131,14.84 ; 31.877,14.838 121.412,14.859 ; 32.131,80.772 121.412,80.772 ; 121.412,14.84 ccw(c121.412,17.653) 124.225,17.653 ; 121.412,80.791 cw(c121.412,77.978) 124.225,77.978 ; 124.206,17.653 124.206,77.978

## Text inside footprints (layer, text, board x,y; h text height)
LED1: Top Overlay "K" at 68.072,19.812 h0.76; Top Courtyard "K" at 68.072,19.812 h0.76
LED2: Top Overlay "K" at 80.899,19.939 h0.76; Top Courtyard "K" at 80.899,19.939 h0.76